# EAGLE board Model01_DIGI (EAGLE 7.6.0)
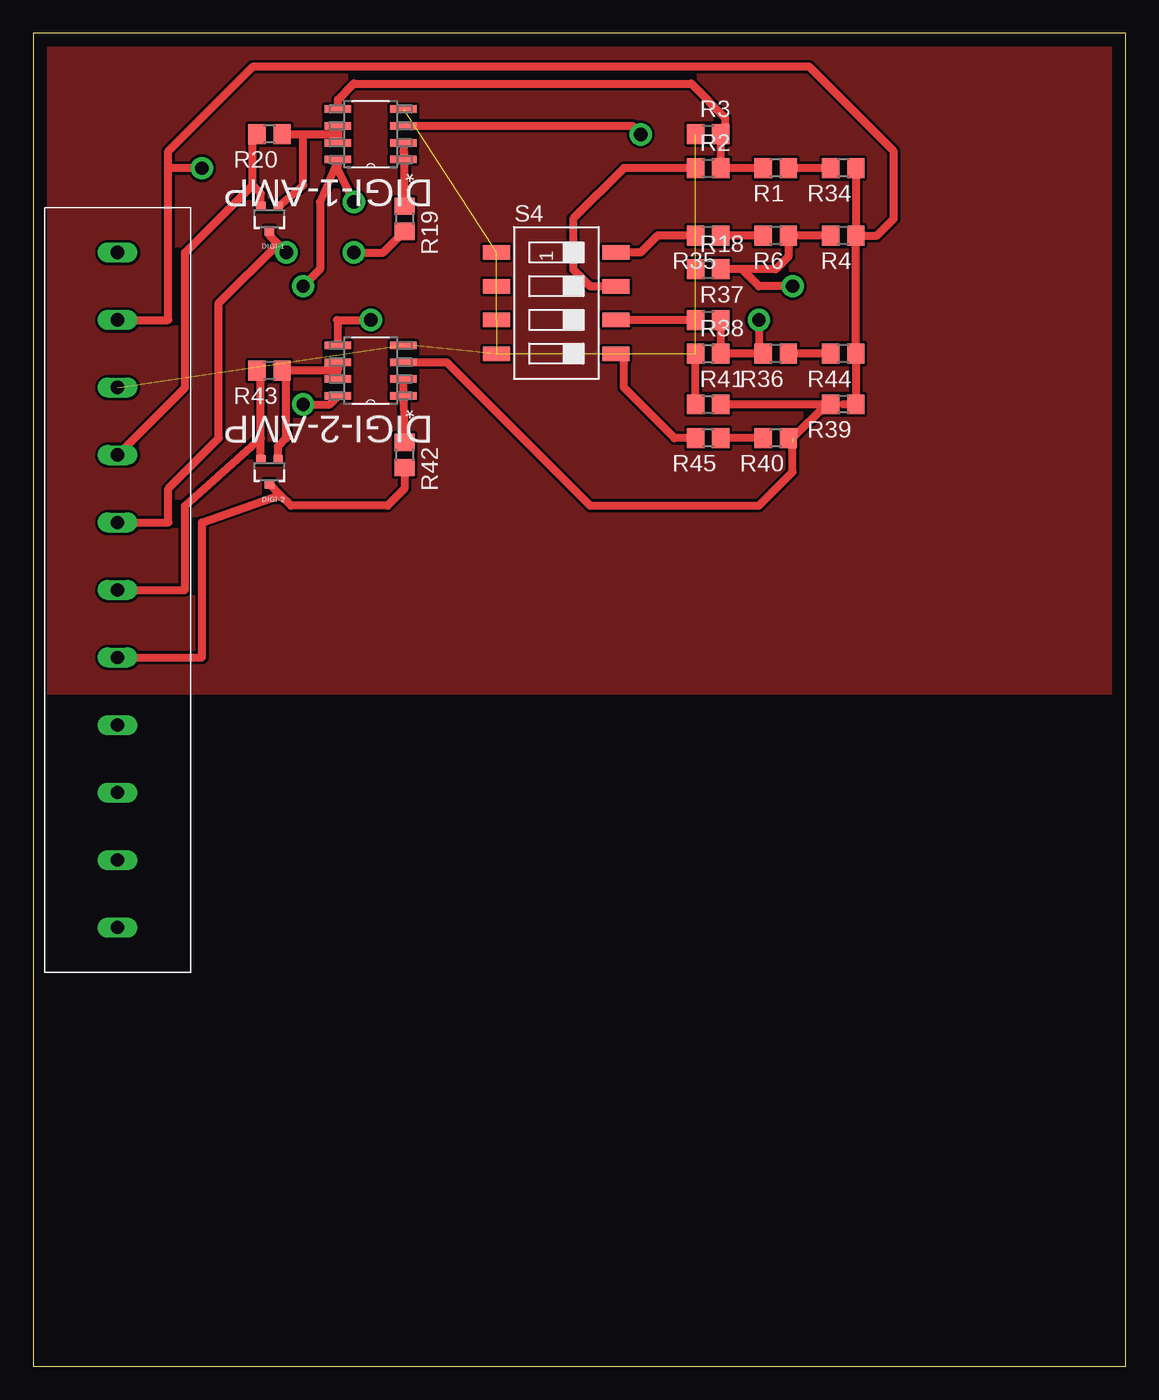
[diagram p0: board, top side]
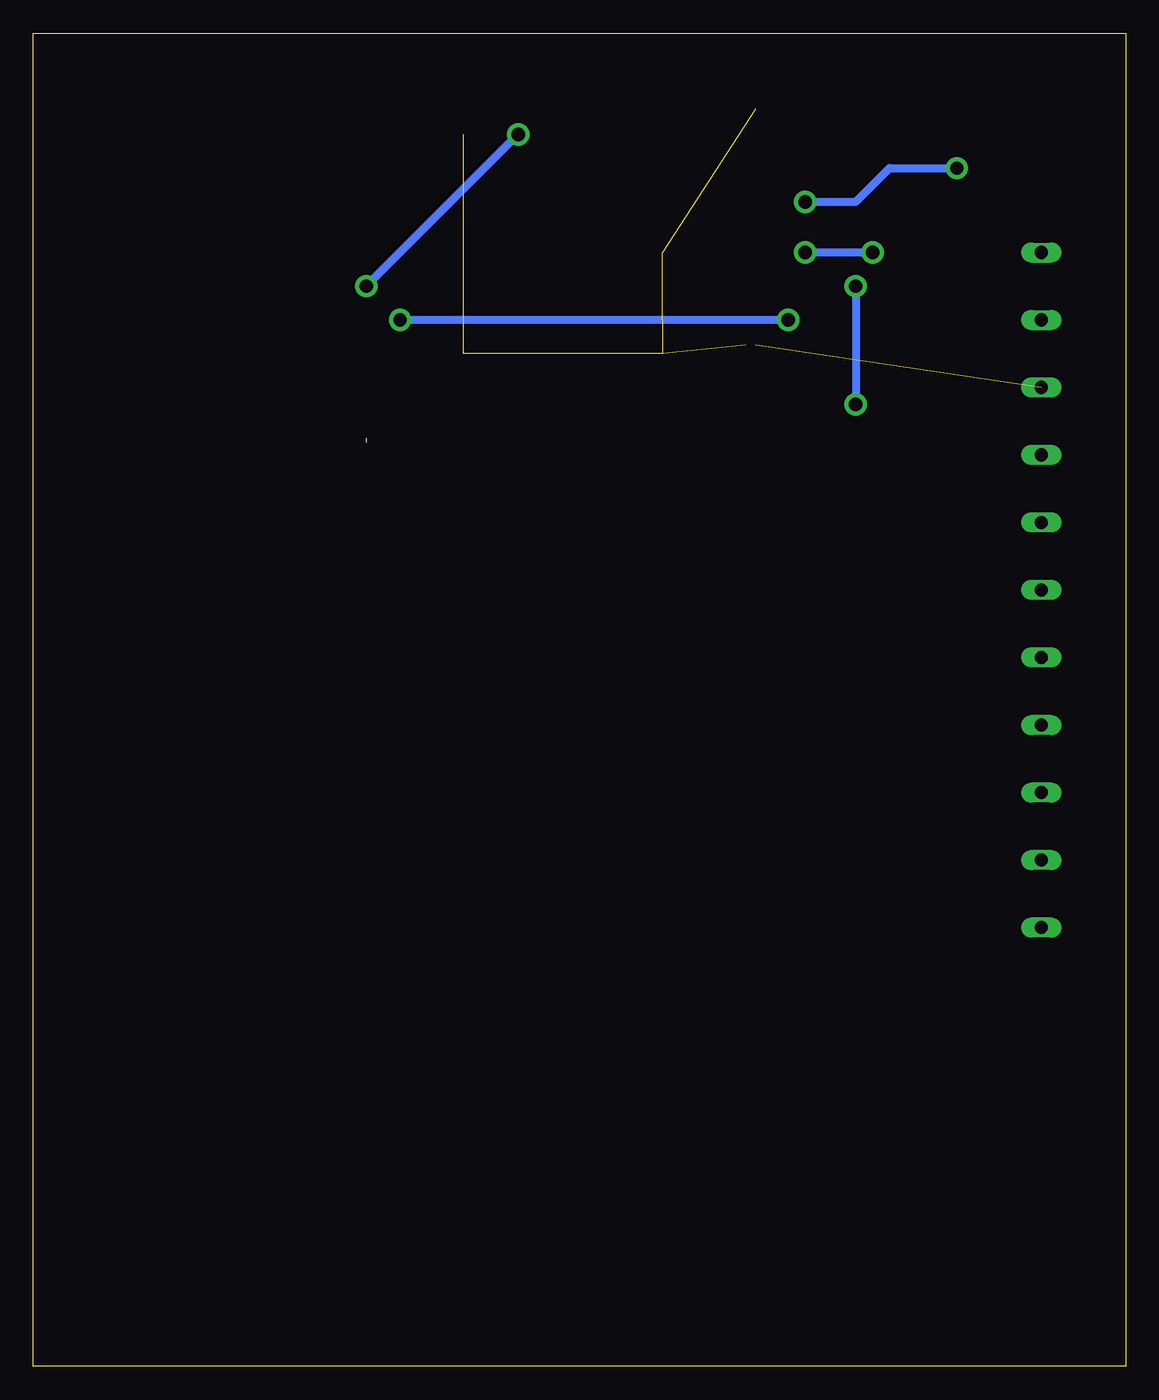
[diagram p1: board, bottom side, seen from below]

Size 82.22 x 100.32 mm. Coordinates in mm from the lower left corner, seen from the top.
Outline: 0,0 82.22,0 82.22,100.32 0,100.32 0,0
Copper layers (1*16): Top 0.035mm / dielectric 1.5mm / Bottom 0.035mm
Design rules "default": minimum track width 10mil, minimum drill 24mil, track to track 8mil, track to pad 8mil, pad to pad 8mil, via to via 8mil, smd to smd 8mil, copper to edge 40mil, drill to drill 8mil, minimum pad ring 10mil, minimum via ring 8mil, stop-mask expansion 4mil, vias tented up to drill 0mil, thermal gap 10mil
Net classes: 0 default: clearance 0.205 mm

## Footprints (pad centres in the part's own frame; a part is rotated, then mirrored left to right if it is on the bottom)
SOT323 = smd 0.7 x 0.7: 1 -0.65,-0.925; 2 0.65,-0.925; 3 0,0.925
SOIC127P600X175-8N = smd 1.981 x 0.559: 1 -2.464,1.905; 2 -2.464,0.635; 3 -2.464,-0.635; 4 -2.464,-1.905; 5 2.464,-1.905; 6 2.464,-0.635; 7 2.464,0.635; 8 2.464,1.905
R0805 = smd 1.3 x 1.5: 1 -0.95,0; 2 0.95,0
SMS-004 = smd 1.092 x 2.007: 1 -3.81,-4.496; 2 -1.27,-4.496; 3 1.27,-4.496; 4 3.81,-4.496; 5 3.81,4.496; 6 1.27,4.496; 7 -1.27,4.496; 8 -3.81,4.496
10KPL508 = drill 1 long: P$1 -20.32,0; P$2 -15.24,0; P$3 -10.16,0; P$4 -5.08,0; P$5 0,0; P$6 5.08,0; P$7 10.16,0; P$8 15.24,0; P$9 20.32,0; P$10 25.4,0; P$11 -25.4,0

## Placement (x,y rotation side)
DIGI-1  MOSFET-NCHANNEL2N7002PW  [SOT323]  17.78,86.36 180 top
DIGI-1-AMP  LM358DR  [SOIC127P600X175-8N]  25.4,92.71 180 top
DIGI-2  MOSFET-NCHANNEL2N7002PW  [SOT323]  17.78,67.31 180 top
DIGI-2-AMP  LM358DR  [SOIC127P600X175-8N]  25.4,74.93 180 top
R1  1k  [R0805]  55.88,90.17 180 top
R2  15k4  [R0805]  50.8,90.17 0 top
R3  10k  [R0805]  50.8,92.71 0 top
R4  10k  [R0805]  60.96,85.09 180 top
R6  9k1  [R0805]  55.88,85.09 180 top
R18  240k  [R0805]  50.8,82.55 0 top
R19  10k  [R0805]  27.94,86.36 270 top
R20  10k  [R0805]  17.78,92.71 180 top
R34  39k  [R0805]  60.96,90.17 180 top
R35  300  [R0805]  50.8,85.09 180 top
R36  1k  [R0805]  55.88,76.2 180 top
R37  15k4  [R0805]  50.8,78.74 0 top
R38  10k  [R0805]  50.8,76.2 0 top
R39  10k  [R0805]  60.96,72.39 180 top
R40  9k1  [R0805]  55.88,69.85 180 top
R41  240k  [R0805]  50.8,72.39 0 top
R42  10k  [R0805]  27.94,68.58 270 top
R43  10k  [R0805]  17.78,74.93 180 top
R44  39k  [R0805]  60.96,76.2 180 top
R45  300  [R0805]  50.8,69.85 180 top
S4  SWS004  [SMS-004]  39.37,80.01 270 top
U$1  5.08PITCHTERMINAL  [10KPL508]  6.35,58.42 270 top

## Library data of the parts
DIGI-1 DIGI-2 = SparkFun-DiscreteSemi; PROD_ID: TRANS-11151
DIGI-1-AMP DIGI-2-AMP = Texas Instruments_By_element14_Batch_1; MPN: LM358DR; OC_FARNELL: 1831865; OC_NEWARK: 34K7599; PACKAGE: SOIC-8; SUPPLIER: Texas Instruments
R1-R4 R6 R18-R20 R34-R45 = rcl
S4 = smd-special
U$1 = ruuviliitin

## Nets
A_HI-LO_IN: U$1.P$9
A_HI-LO_OUT: U$1.P$10
A_LO-HI_IN: U$1.P$7
A_LO-HI_OUT: U$1.P$8
DI-1: DIGI-1-AMP.1 DIGI-1-AMP.2 R19.1
DIGI_HIGH_1: DIGI-1.3 R19.2 U$1.P$4
DIGI_HIGH_2: DIGI-2.3 R42.2 U$1.P$6
DIGI_LOW_1: DIGI-1.2 R20.2 U$1.P$3
DIGI_LOW_2: DIGI-2.2 R43.2 U$1.P$5
GND: DIGI-1-AMP.4 DIGI-2-AMP.4 R3.1 R18.1 R38.1 R41.1 S4.1 S4.2 S4.3 S4.4 U$1.P$2
N$2: DIGI-1-AMP.3 R4.2 R6.1 R18.2
N$4: R2.1 S4.7
N$5: R6.2 R35.1
N$6: DIGI-1-AMP.5 R1.2 R2.2 R3.2
N$8: DIGI-1-AMP.6 DIGI-1-AMP.7 DIGI-1.1 R20.1
N$9: DIGI-2-AMP.5 R36.2 R37.2 R38.2
N$11: DIGI-2-AMP.3 R39.2 R40.1 R41.2
N$15: R1.1 R34.2
N$42: R35.2 S4.8
N$63: DIGI-2-AMP.1 DIGI-2-AMP.2 R42.1
N$64: DIGI-2-AMP.6 DIGI-2-AMP.7 DIGI-2.1 R43.1
N$67: R37.1 S4.6
N$68: R36.1 R44.2
N$69: R40.2 R45.1
N$70: R45.2 S4.5
VCC: DIGI-1-AMP.8 DIGI-2-AMP.8 R4.1 R34.1 R39.1 R44.1 U$1.P$1
VDD: U$1.P$11

## Tracks (layer width: path | path; a pad name or v marks a point on that pad's centre or on a via)
DI-1
  Top 0.61: DIGI-1-AMP.2 27.86,91.44 | 27.86,91.44 DIGI-1-AMP.1 | R19.1 27.94,91.36 27.86,91.44
DIGI_HIGH_1  (via drill 1 pad 1.68)
  Top 0.61: DIGI-1.3 17.78,85.09 18.41,84.45 | 18.41,84.45 v19.05,83.82 | v24.13,83.82 26.35,83.82 R19.2 | 18.41,84.45 13.97,80.01 13.97,69.85 10.16,66.04 10.16,63.5 U$1.P$4
  Bottom 0.61: v19.05,83.82 v24.13,83.82
DIGI_HIGH_2
  Top 0.61: R42.2 27.94,66.04 26.67,64.77 19.39,64.77 18.59,65.58 | 18.59,65.58 DIGI-2.3 | U$1.P$6 12.7,53.34 12.7,63.5 18.59,65.58
DIGI_LOW_1
  Top 0.61: DIGI-1.2 17.13,88.28 16.51,88.9 | 16.51,88.9 16.51,92.39 R20.2 | U$1.P$3 11.43,73.66 11.43,83.82 16.51,88.9
DIGI_LOW_2
  Top 0.61: 16.51,74.93 R43.2 17.13,74.63 17.13,69.85 | DIGI-2.2 17.13,69.85 | U$1.P$5 11.43,58.42 11.43,64.77 17.13,69.85
GND  (9 unrouted)
  Top 0.61: R41.1 R38.1 | DIGI-2-AMP.4 28.57,76.84
N$1
  pour Top: 0,100.33 67.31,100.33 67.31,50.8 0,50.8
N$2  (via drill 1 pad 1.68)
  Top 0.61: R4.2 R6.1 56.83,83.5 55.88,82.55 53.34,82.55 | 53.34,82.55 R18.2 | DIGI-1-AMP.3 45.09,93.34 v45.72,92.71 | v57.15,81.28 54.61,81.28 53.34,82.55
  Bottom 0.61: v45.72,92.71 v57.15,81.28
N$3
  pour Top: 67.31,100.33 82.55,100.33 82.55,50.8 67.31,50.8
N$4
  Top 0.61: R2.1 44.45,90.17 40.64,86.36 40.64,82.55 41.91,81.28 S4.7
N$5
  Top 0.61: R6.2 R35.1
N$6
  Top 0.61: R1.2 R2.2 R3.2 52.07,93.03 52.07,93.98 49.53,96.52 24.13,96.52 22.94,95.33 DIGI-1-AMP.5
N$8
  Top 0.61: DIGI-1-AMP.6 22.94,92.71 | 22.94,92.71 DIGI-1-AMP.7 | R20.1 20.32,92.71 | 20.32,92.71 22.94,92.71 | DIGI-1.1 20.32,88.9 20.32,92.71
N$9  (via drill 1 pad 1.68)
  Top 0.61: R37.2 R38.2 R36.2 54.61,76.52 v54.61,78.74 | DIGI-2-AMP.5 22.94,78.66 22.86,78.74 v25.4,78.74
  Bottom 0.61: v25.4,78.74 v54.61,78.74
N$11  (1 unrouted)
  Top 0.61: R39.2 59.69,72.39 | 57.15,69.85 59.69,72.39 | 59.69,72.39 R41.2 | DIGI-2-AMP.3 31.11,75.56 41.91,64.77 54.61,64.77 57.15,67.31 57.15,69.53 R40.1
N$15
  Top 0.61: R34.2 R1.1
N$42
  Top 0.61: R35.2 46.99,85.09 45.72,83.82 S4.8
N$63
  Top 0.61: R42.1 27.86,72.63 DIGI-2-AMP.1 DIGI-2-AMP.2
N$64
  Top 0.61: DIGI-2-AMP.6 22.94,75.01 22.86,74.93 | 22.86,74.93 22.86,74.37 DIGI-2-AMP.7 | 22.86,74.93 R43.1 19.05,74.61 19.05,69.85 18.43,69.23 DIGI-2.1
N$67
  Top 0.61: R37.1 S4.6
N$68
  Top 0.61: R44.2 R36.1
N$69
  Top 0.61: R40.2 R45.1
N$70
  Top 0.61: R45.2 48.26,69.85 44.45,73.66 44.45,76.2 S4.5
VCC  (via drill 1 pad 1.68)
  Top 0.61: R34.1 R4.1 | 60.96,72.39 R39.1 R44.1 R4.1 | v20.32,81.28 21.59,82.55 21.59,87.63 DIGI-1-AMP.8 22.86,90.17 v24.13,87.63 | R4.1 63.5,85.09 64.77,86.36 64.77,91.44 58.42,97.79 16.51,97.79 10.16,91.44 10.16,90.17 | U$1.P$1 10.16,78.74 10.16,90.17 | v20.32,72.39 22.3,72.39 DIGI-2-AMP.8 | v12.7,90.17 10.16,90.17
  Bottom 0.61: v20.32,81.28 v20.32,72.39 | v24.13,87.63 20.32,87.63 17.78,90.17 v12.7,90.17